# Altium PCB Player.PcbDoc
Units mm, origin at the board's own origin, x right, y up, seen from the top; angles counter-clockwise.
Board outline 30 x 70 mm, 2 copper layers (Top Layer, Bottom Layer); 116 components, 240 nets, 954 pads, 32 vias.
Unrouted connection lines stored in the file: 497.
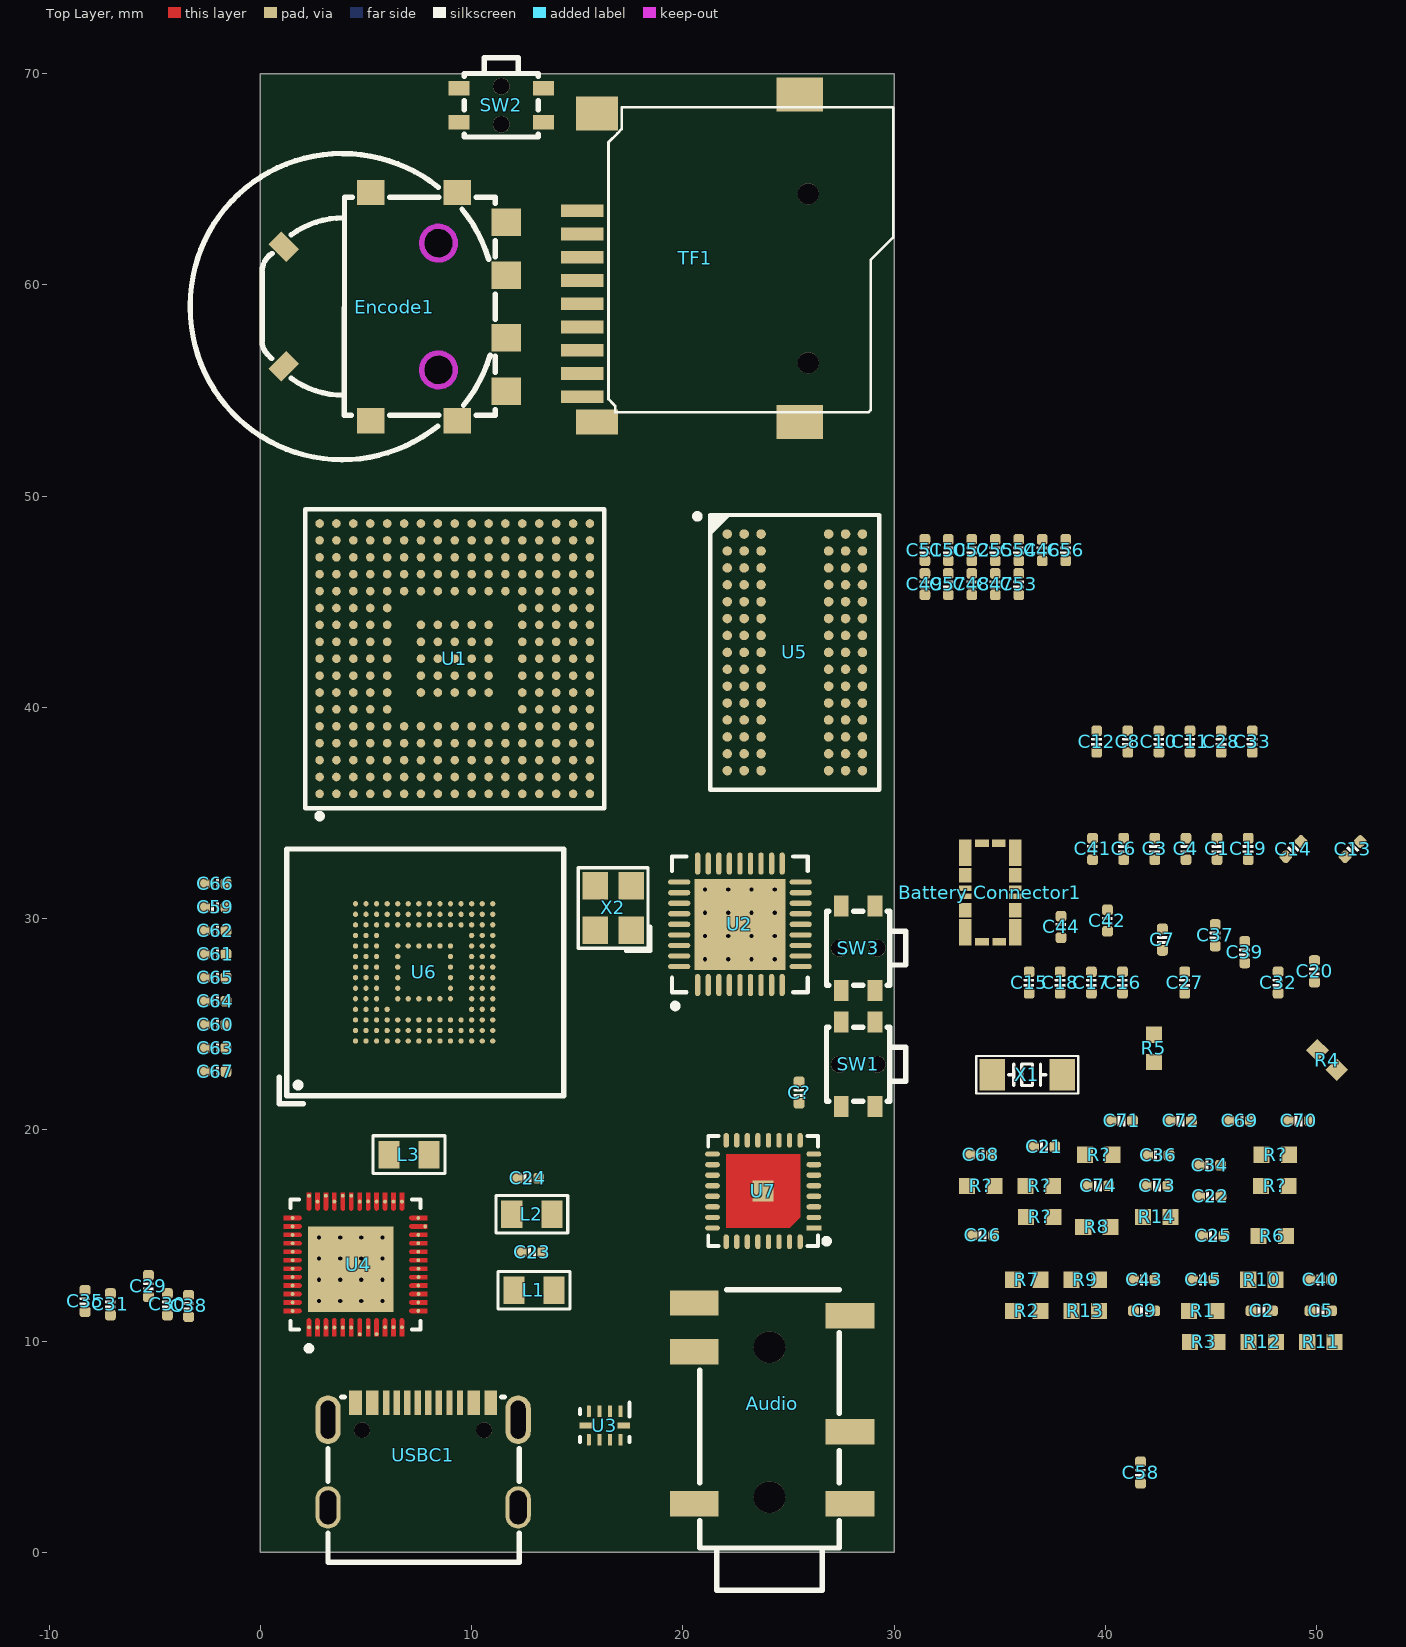
[diagram p0: Top Layer view]
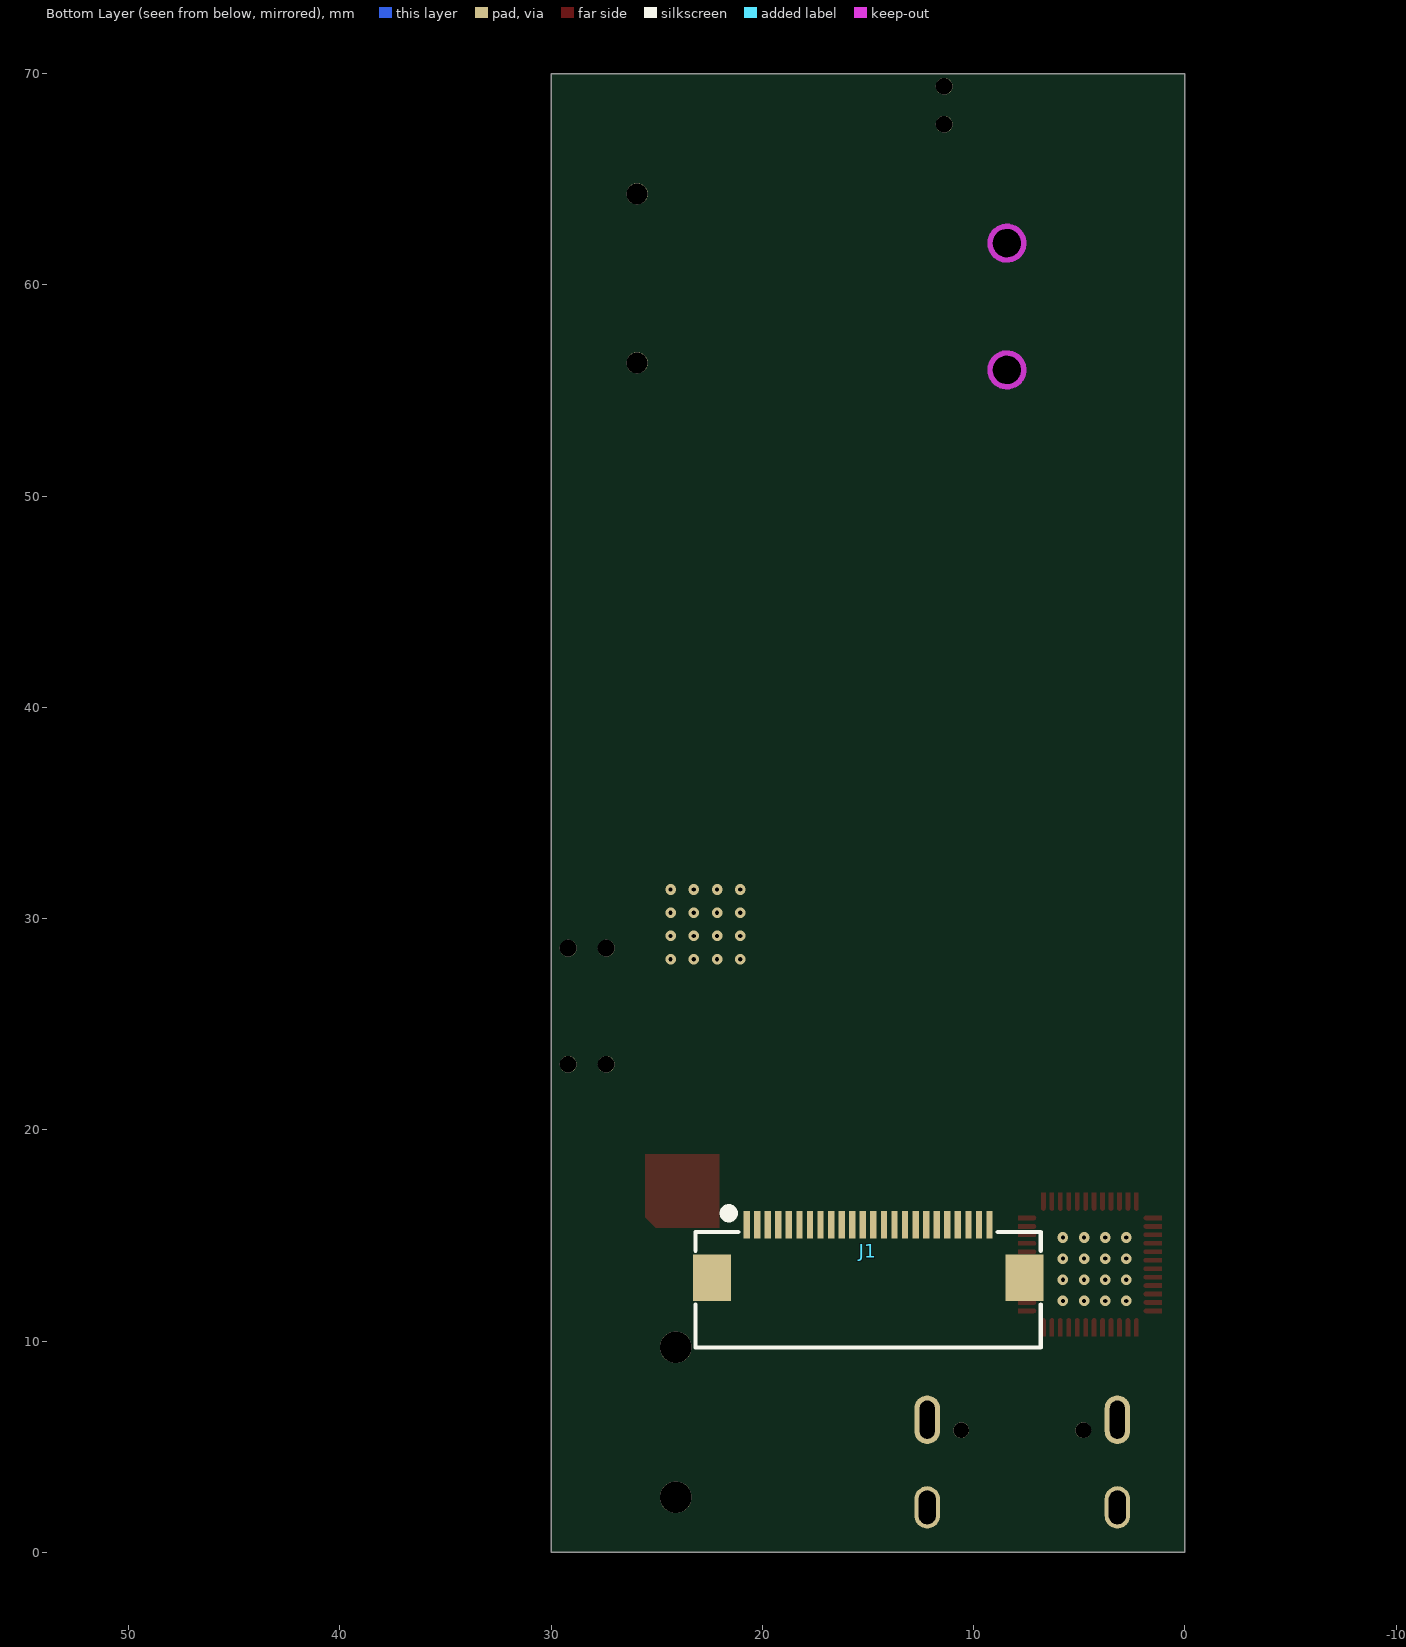
[diagram p1: Bottom Layer view, seen from below]

## Layer stack, top to bottom
Top Solder: solder mask 0.0102, Solder Resist, Dk 3.5
Top Layer: signal copper 0.0356
Dielectric 1: dielectric 0.32, FR-4, Dk 4.8
Bottom Layer: signal copper 0.0356
Bottom Solder: solder mask 0.0102, Solder Resist, Dk 3.5

## Board outline
0,0 0,70 30,70 30,0

## Design rules (kind name [scope] priority, off if disabled: settings)
Clearance [All] p1: gap=0.254 ignorepadtopadclearanceinfootprint=FALSE
DiffPairsRouting "Schematic Differential Pairs Routing_1" [InNetClass('MIPI')] p1: maxlimit=0.254 minlimit=0.102 mostfreqgap=0.152 toplayer_minwidth=0.102 toplayer_maxwidth=0.381 toplayer_prefwidth=0.152 bottomlayer_minwidth=0.102 bottomlayer_maxwidth=0.381 bottomlayer_prefwidth=0.152 maxuncoupledlength=2.54
DiffPairsRouting "Schematic Differential Pairs Routing" [InDifferentialPairClass('USB')] p2: maxlimit=0.254 minlimit=0.102 mostfreqgap=0.152 toplayer_minwidth=0.102 toplayer_maxwidth=0.381 toplayer_prefwidth=0.152 bottomlayer_minwidth=0.102 bottomlayer_maxwidth=0.381 bottomlayer_prefwidth=0.152 maxuncoupledlength=2.54
DiffPairsRouting [All] p3: maxlimit=0.254 minlimit=0.254 mostfreqgap=0.254 toplayer_minwidth=0.381 toplayer_maxwidth=0.381 toplayer_prefwidth=0.381 bottomlayer_minwidth=0.381 bottomlayer_maxwidth=0.381 bottomlayer_prefwidth=0.381 maxuncoupledlength=12.7
MatchedLengths "Schematic Matched Net Lengths" [InNetClass('MIPI')] p1: tolerance=1.27 checknetsindiffpair=FALSE checkdiffpairvsdiffpair=TRUE checkxsignals=TRUE checkothers=TRUE
PolygonConnect [All] p1: connectstyle=Relief reliefconductorwidth=0.254 reliefentries=4 polygonreliefangle="90 Angle" airgapwidth=0.254
RoutingVias [All] p1: holewidth=0.711 width=1.27 viastyle="Through Hole" minholewidth=0.711 minwidth=1.27 maxholewidth=0.711 maxwidth=1.27
SolderMaskExpansion [All] p1: expansion=0.102 istentingtop=FALSE
SupplyNets "Schematic Supply Nets_19" [InNet('VFBSMPS')] p1: voltage=0.000
SupplyNets "Schematic Supply Nets_18" [InNet('VDDCAPDSI')] p2: voltage=0.000
SupplyNets "Schematic Supply Nets_16" [InNet('VSYS')] p3: voltage=0.000
SupplyNets "Schematic Supply Nets_15" [InNet('VCC')] p4: voltage=0.000
SupplyNets "Schematic Supply Nets_14" [InNet('VLDO2_3.3V')] p5: voltage=0.000
SupplyNets "Schematic Supply Nets_12" [InNet('VLDO3_1.8V')] p6: voltage=0.000
SupplyNets "Schematic Supply Nets_11" [InNet('VBUS')] p7: voltage=0.000
SupplyNets "Schematic Supply Nets_10" [InNet('VBATT')] p8: voltage=0.000
SupplyNets "Schematic Supply Nets_9" [InNet('VDCDC2')] p9: voltage=0.000
SupplyNets "Schematic Supply Nets_8" [InNet('VLDO1_1.8V')] p10: voltage=0.000
SupplyNets "Schematic Supply Nets_5" [InNet('VDCDC1')] p11: voltage=0.000
SupplyNets "Schematic Supply Nets_4" [InNet('VLDO4_3.3V')] p12: voltage=0.000
SupplyNets "Schematic Supply Nets_1" [InNet('VDCDC3')] p13: voltage=0.000
Width [All] p1: maxlimit=0.254 minlimit=0.254 preferedwidth=0.254
29 further rules are at their usual default settings.

## Classes and differential pairs
differential pair class USB: DBG_USB MCU_USB USB
differential pair class MIPI: DSI_CK DSI_D0 DSI_D1
net class MIPI: DSI_CK_N DSI_CK_P DSI_D0_N DSI_D0_P DSI_D1_N DSI_D1_P
differential pair USB: +USB_P -USB_N
differential pair MCU_USB: +MCU_USB_P -MCU_USB_N
differential pair DSI_D1: +DSI_D1_P -DSI_D1_N
differential pair DSI_D0: +DSI_D0_P -DSI_D0_N
differential pair DSI_CK: +DSI_CK_P -DSI_CK_N
differential pair DBG_USB: +DBG_USB_P -DBG_USB_N

## Components (designator, comment, footprint, x,y, rotation, side; value= is the part's Value field where it differs from the comment)
Audio "PJ342" PJ342A 24.1,-1.8 r180 top
"Battery Connector1" "BM25-4S" BM25-4S/2-V-51 34.549,31.228 r90 top
C1 "10p" 0402-C 45.287,33.293 r270 top value=0.1u
C2 "10p" 0402-C 47.401,11.427 r0 top value=0.1u
C3 "0.1uF" 0402-C 42.341,33.293 r270 top value=0.1u
C4 "0.1uF" 0402-C 43.814,33.293 r90 top value=0.1u
C5 "0.1uF" 0402-C 50.195,11.427 r0 top value=0.1u
C6 "0.1uF" 0402-C 40.867,33.293 r270 top value=0.1u
C7 "0.1uF" 0402-C 42.7,29 r90 top value=0.1u
C8 "0.1uF" 0402-C 41.062,38.376 r270 top value=0.1u
C9 "0.1uF" 0402-C 41.834,11.427 r0 top value=0.1u
C10 "0.1uF" 0402-C 42.536,38.376 r90 top value=0.1u
C11 "0.1uF" 0402-C 44.009,38.376 r270 top value=0.1u
C12 "0.1uF" 0402-C 39.589,38.376 r270 top value=0.1u
C13 "0.1uF" 0402-C 51.707,33.287 r45 top value=0.1u
C14 "0.1uF" 0402-C 48.9,33.287 r45 top value=0.1u
C15 "0.1uF" 0402-C 36.391,26.97 r90 top value=0.1u
C16 "0.1uF" 0402-C 40.811,26.97 r90 top value=0.1u
C17 "0.1uF" 0402-C 39.338,26.97 r90 top value=0.1u
C18 "0.1uF" 0402-C 37.864,26.97 r90 top value=0.1u
C19 "0.1uF" 0402-C 46.76,33.293 r270 top value=0.1u
C20 "10uF" 0402-C 49.9,27.5 r270 top value=0.1u
C21 "0.1uF" 0402-C 37.1,19.2 r0 top value=0.1u
C22 "10uF" 0402-C 44.96,16.846 r0 top value=0.1u
C23 "10uF" 0402-C 12.862,14.2 r180 top value=0.1u
C24 "10uF" 0402-C 12.662,17.7 r180 top value=0.1u
C25 "10uF" 0402-C 45.108,14.973 r0 top value=0.1u
C26 "0.1uF" 0402-C 34.2,15 r0 top value=0.1u
C27 "3.9p" 0402-C 43.757,26.97 r90 top value=0.1u
C28 "3.9p" 0402-C 45.482,38.376 r90 top value=0.1u
C29 "10uF" 0402-C -5.3,12.6 r90 top value=0.1u
C30 "10uF" 0402-C -4.4,11.738 r270 top value=0.1u
C31 "10uF" 0402-C -7.1,11.738 r270 top value=0.1u
C32 "10uF" 0402-C 48.177,26.97 r270 top value=0.1u
C33 "10uF" 0402-C 46.955,38.376 r270 top value=0.1u
C34 "10uF" 0402-C 44.94,18.32 r0 top value=0.1u
C35 "10uF" 0402-C -8.3,11.892 r270 top value=0.1u
C36 "10uF" 0402-C 42.5,18.8 r0 top value=0.1u
C37 "0.1uF" 0402-C 45.2,29.208 r90 top value=0.1u
C38 "10uF" 0402-C -3.4,11.662 r90 top value=0.1u
C39 "10uF" 0402-C 46.6,28.408 r90 top value=0.1u
C40 "10uF" 0402-C 50.195,12.9 r0 top value=0.1u
C41 "10uF" 0402-C 39.394,33.293 r270 top value=0.1u
C42 "10uF" 0402-C 40.1,29.9 r270 top value=0.1u
C43 "0.1uF" 0402-C 41.834,12.9 r0 top value=0.1u
C44 "0.1uF" 0402-C 37.9,29.6 r270 top value=0.1u
C45 "0.1uF" 0402-C 44.628,12.9 r0 top value=0.1u
C46 "100nF" 0402-C 37.012,47.44 r270 top value=0.1u
C47 "100nF" 0402-C 34.789,45.829 r270 top value=0.1u
C48 "100nF" 0402-C 33.678,45.829 r270 top value=0.1u
C49 "100nF" 0402-C 31.456,45.829 r90 top value=0.1u
C50 "100nF" 0402-C 32.567,47.44 r90 top value=0.1u
C51 "100nF" 0402-C 31.456,47.44 r90 top value=0.1u
C52 "100nF" 0402-C 33.678,47.44 r90 top value=0.1u
C53 "100nF" 0402-C 35.9,45.829 r270 top value=0.1u
C54 "100nF" 0402-C 35.9,47.44 r270 top value=0.1u
C55 "100nF" 0402-C 34.789,47.44 r270 top value=0.1u
C56 "100nF" 0402-C 38.123,47.44 r90 top value=0.1u
C57 "100nF" 0402-C 32.567,45.829 r90 top value=0.1u
C58 "1uF" 0402-C 41.665,3.773 r90 top value=0.1u
C59 "100nF" 0402-C -2.14,30.534 r180 top value=0.1u
C60 "100nF" 0402-C -2.14,24.978 r180 top value=0.1u
C61 "100nF" 0402-C -2.14,28.312 r180 top value=0.1u
C62 "100nF" 0402-C -2.14,29.423 r180 top value=0.1u
C63 "100nF" 0402-C -2.14,23.867 r180 top value=0.1u
C64 "100nF" 0402-C -2.14,26.089 r180 top value=0.1u
C65 "100nF" 0402-C -2.14,27.2 r180 top value=0.1u
C66 "100nF" 0402-C -2.14,31.645 r180 top value=0.1u
C67 "100nF" 0402-C -2.14,22.756 r180 top value=0.1u
C68 "1uF" 0402-C 34.105,18.82 r0 top value=0.1u
C69 "1uF" 0402-C 46.36,20.431 r0 top value=0.1u
C70 "1uF" 0402-C 49.154,20.431 r0 top value=0.1u
C71 "1uF" 0402-C 40.772,20.431 r0 top value=0.1u
C72 "1uF" 0402-C 43.566,20.431 r0 top value=0.1u
C73 "1uF" 0402-C 42.446,17.346 r0 top value=0.1u
C74 "1uF" 0402-C 39.652,17.346 r0 top value=0.1u
C? "1uF" 0402-C 25.5,21.762 r90 top value=0.1u
Encode1 "SIQ-02FVS3" SW-SMD_SIQ-02FVS3_1 6.364,58.972 r90 top
J1 "YDP290H001-V3" FPC0.5-WT-24P 15,13 r180 bottom locked
L1 "2.2uH" L0805 12.95,12.4 r0 top
L2 "2.2uH" L0805 12.85,16 r180 top
L3 "2.2uH" L0805 7.032,18.825 r0 top
R1 "5.1k" 0603-R 44.617,11.427 r180 top
R2 "5.1k" 0603-R 36.277,11.427 r180 top
R3 "10k" 0603-R 44.659,9.954 r0 top
R4 "10k" 0603-R 50.5,23.3 r135 top
R5 "10K" 0603-R 42.3,23.85 r270 top
R6 "10K" 0603-R 47.892,14.973 r180 top
R7 "100" 0603-R 36.277,12.9 r0 top
R8 "10K" 0603-R 39.6,15.4 r180 top
R9 "10K" 0603-R 39.05,12.9 r180 top
R10 "10K" 0603-R 47.411,12.9 r0 top
R11 "10K" 0603-R 50.205,9.954 r0 top
R12 "10K" 0603-R 47.432,9.954 r180 top
R13 "56K" 0603-R 39.05,11.427 r180 top
R14 "56K" 0603-R 42.435,15.873 r0 top
R? "10K" 0603-R 48.044,18.82 r0 top
R? "10K" 0603-R 34.095,17.346 r0 top
R? "10K" 0603-R 36.868,17.346 r0 top
R? "10K" 0603-R 39.683,18.82 r0 top
R? "10K" 0603-R 48.023,17.346 r0 top
R? "10K" 0603-R 36.889,15.873 r0 top
SW1 "TD-1187SA-250" SW-SMD-3.5*3.0_4P 28.3,23.1 r270 top
SW2 "TD-1187SA-250" SW-SMD-3.5*3.0_4P 11.4,68.5 r0 top
SW3 "TD-1187SA-250" SW-SMD-3.5*3.0_4P 28.3,28.6 r270 top
TF1 "TF CARD" TF卡座 22.6,61 r0 top
U1 "STM32H747XIH6" FP-TFBGA240+25-A07U-MFG 9.2,42.3 r90 top
U2 "STM32F103TBU6" VFQFPN36_N 22.7,29.725 r90 top
U3 "TS3USB221ARSER" RSE0010A_V 16.3,6 r270 top
U4 "TPS65217DRSLR" FP-RSL0048A-MFG 4.5,13.625 r90 top
U5 "IS42S32800G-6BLI" BGA-90_L13.0-W8.0-R6-C15-P0.80-TL 25.3,42.6 r0 top
U6 "KLM8G1GETF-B041006" FBGA-153_L13.0-W11.5-P0.50_KLMAG1JETD-B041 7.75,27.45 r90 top
U7 "ES9039Q2M" "QFN32 5x5_L" 23.8,17.1 r90 top
USBC1 "USB Type C -16P" USB-C-SMD_16P 7.7,4.6 r180 top
X1 "8M" XTAL-3215-2P 36.3,22.6 r0 top
X2 "25M" XTAL-3225-4P 16.7,30.5 r90 top

## Footprints (in the part's own frame and the unit in brackets; to place one, negate y for a bottom-side part, rotate by r counter-clockwise, add the part's x,y. Pads: shape width x height; smd on the part's side, far side on the other; paste and mask are expansions set on the pad)
0402-C [mil]
  rrect50% 20x20 smd: 1(-20,0) 2(20,0)
  silkscreen extent -7,-9 7,9, body extent -20,-10 20,10, height 20
0603-R [mil] "1/10W贴片电阻"
  rect 30x30 smd: 1(-25.59,0) 2(25.59,0)
  body extent -31,-16 31,16, height 16
BGA-90_L13.0-W8.0-R6-C15-P0.80-TL [mm]
  round 0.45 smd: A1(-3.2,5.6) A2(-2.4,5.6) A3(-1.6,5.6) A7(1.6,5.6) A8(2.4,5.6) A9(3.2,5.6) B1(-3.2,4.8) B2(-2.4,4.8) B3(-1.6,4.8) B7(1.6,4.8) B8(2.4,4.8) B9(3.2,4.8) C1(-3.2,4) C2(-2.4,4) C3(-1.6,4) C7(1.6,4) C8(2.4,4) C9(3.2,4) D1(-3.2,3.2) D2(-2.4,3.2) D3(-1.6,3.2) D7(1.6,3.2) D8(2.4,3.2) D9(3.2,3.2) E1(-3.2,2.4) E2(-2.4,2.4) E3(-1.6,2.4) E7(1.6,2.4) E8(2.4,2.4) E9(3.2,2.4) F1(-3.2,1.6) F2(-2.4,1.6) F3(-1.6,1.6) F7(1.6,1.6) F8(2.4,1.6) F9(3.2,1.6) G1(-3.2,0.8) G2(-2.4,0.8) G3(-1.6,0.8) G7(1.6,0.8) G8(2.4,0.8) G9(3.2,0.8) H1(-3.2,0) H2(-2.4,0) H3(-1.6,0) H7(1.6,0) H8(2.4,0) H9(3.2,0) J1(-3.2,-0.8) J2(-2.4,-0.8) J3(-1.6,-0.8) J7(1.6,-0.8) J8(2.4,-0.8) J9(3.2,-0.8) K1(-3.2,-1.6) K2(-2.4,-1.6) K3(-1.6,-1.6) K7(1.6,-1.6) K8(2.4,-1.6) K9(3.2,-1.6) L1(-3.2,-2.4) L2(-2.4,-2.4) L3(-1.6,-2.4) L7(1.6,-2.4) L8(2.4,-2.4) L9(3.2,-2.4) M1(-3.2,-3.2) M2(-2.4,-3.2) M3(-1.6,-3.2) M7(1.6,-3.2) M8(2.4,-3.2) M9(3.2,-3.2) N1(-3.2,-4) N2(-2.4,-4) N3(-1.6,-4) N7(1.6,-4) N8(2.4,-4) N9(3.2,-4) P1(-3.2,-4.8) P2(-2.4,-4.8) P3(-1.6,-4.8) P7(1.6,-4.8) P8(2.4,-4.8) P9(3.2,-4.8) R1(-3.2,-5.6) R2(-2.4,-5.6) R3(-1.6,-5.6) R7(1.6,-5.6) R8(2.4,-5.6) R9(3.2,-5.6)
  silkscreen extent -4.74,-6.5 4,6.56, body extent -4,-6.5 4,6.5, height 0.9
BM25-4S/2-V-51 [mm] "Battery Connector"
  rect 0.7x0.6 smd: 1(-0.833,-1.185) 2(-0.833,1.185) 7(0.818,-1.185) 8(0.818,1.185)
  rect 0.25x0.6 smd: 3(-0.175,-1.185) 4(-0.175,1.185) 5(0.206,-1.185) 6(0.206,1.185)
  rect 1.25x0.6 smd: 9(-1.881,-1.185) 10(-1.881,1.185) 11(1.881,-1.185) 12(1.881,1.185)
  rect 0.35x0.65 smd: 13(-2.331,-0.423) 14(-2.331,0.395) 15(2.331,-0.399) 16(2.331,0.395)
  body extent -2.5,-1.3 2.5,1.3, height 0.7
FBGA-153_L13.0-W11.5-P0.50_KLMAG1JETD-B041 [mm]
  round 0.25 smd paste-100 mask+0.05: A1(-3.25,3.25) A2(-2.75,3.25) A3(-2.25,3.25) A4(-1.75,3.25) A5(-1.25,3.25) A6(-0.75,3.25) A7(-0.25,3.25) A8(0.25,3.25) A9(0.75,3.25) A10(1.25,3.25) A11(1.75,3.25) A12(2.25,3.25) A13(2.75,3.25) A14(3.25,3.25) B1(-3.25,2.75) B2(-2.75,2.75) B3(-2.25,2.75) B4(-1.75,2.75) B5(-1.25,2.75) B6(-0.75,2.75) B7(-0.25,2.75) B8(0.25,2.75) B9(0.75,2.75) B10(1.25,2.75) B11(1.75,2.75) B12(2.25,2.75) B13(2.75,2.75) B14(3.25,2.75) C1(-3.25,2.25) C2(-2.75,2.25) C3(-2.25,2.25) C4(-1.75,2.25) C5(-1.25,2.25) C6(-0.75,2.25) C7(-0.25,2.25) C8(0.25,2.25) C9(0.75,2.25) C10(1.25,2.25) C11(1.75,2.25) C12(2.25,2.25) C13(2.75,2.25) C14(3.25,2.25) D1(-3.25,1.75) D2(-2.75,1.75) D3(-2.25,1.75) D4(-1.75,1.75) D12(2.25,1.75) D13(2.75,1.75) D14(3.25,1.75) E1(-3.25,1.25) E2(-2.75,1.25) E3(-2.25,1.25) E5(-1.25,1.25) E6(-0.75,1.25) E7(-0.25,1.25) E8(0.25,1.25) E9(0.75,1.25) E10(1.25,1.25) E12(2.25,1.25) E13(2.75,1.25) E14(3.25,1.25) F1(-3.25,0.75) F2(-2.75,0.75) F3(-2.25,0.75) F5(-1.25,0.75) F10(1.25,0.75) F12(2.25,0.75) F13(2.75,0.75) F14(3.25,0.75) G1(-3.25,0.25) G2(-2.75,0.25) G3(-2.25,0.25) G5(-1.25,0.25) G10(1.25,0.25) G12(2.25,0.25) G13(2.75,0.25) G14(3.25,0.25) H1(-3.25,-0.25) H2(-2.75,-0.25) H3(-2.25,-0.25) H5(-1.25,-0.25) H10(1.25,-0.25) H12(2.25,-0.25) H13(2.75,-0.25) H14(3.25,-0.25) J1(-3.25,-0.75) J2(-2.75,-0.75) J3(-2.25,-0.75) J5(-1.25,-0.75) J10(1.25,-0.75) J12(2.25,-0.75) J13(2.75,-0.75) J14(3.25,-0.75) K1(-3.25,-1.25) K2(-2.75,-1.25) K3(-2.25,-1.25) K5(-1.25,-1.25) K6(-0.75,-1.25) K7(-0.25,-1.25) K8(0.25,-1.25) K9(0.75,-1.25) K10(1.25,-1.25) K12(2.25,-1.25) K13(2.75,-1.25) K14(3.25,-1.25) L1(-3.25,-1.75) L2(-2.75,-1.75) L3(-2.25,-1.75) L12(2.25,-1.75) L13(2.75,-1.75) L14(3.25,-1.75) M1(-3.25,-2.25) M2(-2.75,-2.25) M3(-2.25,-2.25) M4(-1.75,-2.25) M5(-1.25,-2.25) M6(-0.75,-2.25) M7(-0.25,-2.25) M8(0.25,-2.25) M9(0.75,-2.25) M10(1.25,-2.25) M11(1.75,-2.25) M12(2.25,-2.25) M13(2.75,-2.25) M14(3.25,-2.25) N1(-3.25,-2.75) N2(-2.75,-2.75) N3(-2.25,-2.75) N4(-1.75,-2.75) N5(-1.25,-2.75) N6(-0.75,-2.75) N7(-0.25,-2.75) N8(0.25,-2.75) N9(0.75,-2.75) N10(1.25,-2.75) N11(1.75,-2.75) N12(2.25,-2.75) N13(2.75,-2.75) N14(3.25,-2.75) P1(-3.25,-3.25) P2(-2.75,-3.25) P3(-2.25,-3.25) P4(-1.75,-3.25) P5(-1.25,-3.25) P6(-0.75,-3.25) P7(-0.25,-3.25) P8(0.25,-3.25) P9(0.75,-3.25) P10(1.25,-3.25) P11(1.75,-3.25) P12(2.25,-3.25) P13(2.75,-3.25) P14(3.25,-3.25)
  silkscreen extent -6.22,-6.61 5.84,6.86, body extent -5.75,-6.5 5.75,6.5, height 0.89
FP-RSL0048A-MFG [mm] "QFN, 16-Leads, Body 3x3mm, Pitch 0.5mm, Thermal Pad 1.3x1.3mm, IPC Low Density"
  round 0.18 smd paste+0 mask+0: 1(-2.975,2.2) 2(-2.985,1.8) 3(-2.985,1.4) 4(-2.985,1) 5(-2.985,0.6) 6(-2.985,0.2) 7(-3.3,-0.2) 8(-2.975,-0.6) 9(-3.3,-1) 10(-2.975,-1.4) 11(-2.975,-1.8) 12(-2.975,-2.2) 13(-2.2,-2.975) 14(-1.8,-2.975) 15(-1.4,-2.985) 16(-1,-2.975) 17(-0.6,-2.985) 18(-0.2,-2.985) 19(0.2,-2.975) 20(0.6,-2.975) 21(1,-2.975) 22(1.4,-2.975) 23(1.8,-3.3) 24(2.2,-2.975) 25(2.975,-2.2) 26(2.975,-1.8) 27(2.975,-1.4) 28(2.975,-1) 29(2.985,-0.6) 30(2.975,-0.2) 31(3.25,0.2) 32(3.25,0.6) 33(2.975,1) 34(3.25,1.4) 35(2.975,1.8) 36(3.25,2.2) 37(2.2,2.975) 38(1.8,2.975) 39(1.4,2.975) 40(1,2.975) 41(0.6,2.975) 42(0.2,2.975) 43(-0.2,2.975) 44(-0.6,2.975) 45(-1,2.975) 46(-1.4,2.975) 47(-1.8,2.975) 48(-2.2,2.975)
  rect 4.05x4.05 smd paste-1000 mask+0: 49(-0.225,0.225)
  Top Layer region: -2.1,3.4 -2.1,2.65 -2.113,2.6 -2.15,2.563 -2.2,2.55 -2.2,2.55 -2.238,2.558 -2.271,2.579 -2.292,2.612 -2.3,2.65 -2.3,2.65 -2.3,3.4
  Top Layer region: -1.7,3.4 -1.7,2.65 -1.708,2.612 -1.729,2.579 -1.762,2.558 -1.8,2.55 -1.8,2.55 -1.838,2.558 -1.871,2.579 -1.892,2.612 -1.9,2.65 -1.9,2.65 -1.9,3.4
  Top Layer region: -1.3,3.4 -1.3,2.65 -1.313,2.6 -1.35,2.563 -1.4,2.55 -1.4,2.55 -1.438,2.558 -1.471,2.579 -1.492,2.612 -1.5,2.65 -1.5,2.65 -1.5,3.4
  Top Layer region: -0.9,3.4 -0.9,2.65 -0.908,2.612 -0.929,2.579 -0.962,2.558 -1,2.55 -1,2.55 -1.038,2.558 -1.071,2.579 -1.092,2.612 -1.1,2.65 -1.1,2.65 -1.1,3.4
  Top Layer region: -0.5,3.4 -0.5,2.65 -0.508,2.612 -0.529,2.579 -0.562,2.558 -0.6,2.55 -0.6,2.55 -0.638,2.558 -0.671,2.579 -0.692,2.612 -0.7,2.65 -0.7,2.65 -0.7,3.4
  Top Layer region: -0.1,3.4 -0.1,2.65 -0.113,2.6 -0.15,2.563 -0.2,2.55 -0.2,2.55 -0.238,2.558 -0.271,2.579 -0.292,2.612 -0.3,2.65 -0.3,2.65 -0.3,3.4
  Top Layer region: 0.3,3.4 0.3,2.65 0.292,2.612 0.271,2.579 0.238,2.558 0.2,2.55 0.2,2.55 0.162,2.558 0.129,2.579 0.108,2.612 0.1,2.65 0.1,2.65 0.1,3.4
  Top Layer region: 0.7,3.4 0.7,2.65 0.692,2.612 0.671,2.579 0.638,2.558 0.6,2.55 0.6,2.55 0.562,2.558 0.529,2.579 0.508,2.612 0.5,2.65 0.5,2.65 0.5,3.4
  Top Layer region: 1.1,3.4 1.1,2.65 1.092,2.612 1.071,2.579 1.038,2.558 1,2.55 1,2.55 0.962,2.558 0.929,2.579 0.908,2.612 0.9,2.65 0.9,2.65 0.9,3.4
  Top Layer region: 1.5,3.4 1.5,2.65 1.492,2.612 1.471,2.579 1.438,2.558 1.4,2.55 1.4,2.55 1.362,2.558 1.329,2.579 1.308,2.612 1.3,2.65 1.3,2.65 1.3,3.4
  Top Layer region: 1.9,3.4 1.9,2.65 1.892,2.612 1.871,2.579 1.838,2.558 1.8,2.55 1.8,2.55 1.762,2.558 1.729,2.579 1.708,2.612 1.7,2.65 1.7,2.65 1.7,3.4
  Top Layer region: 2.3,3.4 2.3,2.65 2.287,2.6 2.25,2.563 2.2,2.55 2.2,2.55 2.162,2.558 2.129,2.579 2.108,2.612 2.1,2.65 2.1,2.65 2.1,3.4
  Top Layer region: 3.4,2.1 2.65,2.1 2.612,2.108 2.579,2.129 2.558,2.162 2.55,2.2 2.55,2.2 2.558,2.238 2.579,2.271 2.612,2.292 2.65,2.3 2.65,2.3 3.4,2.3
  Top Layer region: 3.4,1.7 2.65,1.7 2.612,1.708 2.579,1.729 2.558,1.762 2.55,1.8 2.55,1.8 2.558,1.838 2.579,1.871 2.612,1.892 2.65,1.9 2.65,1.9 3.4,1.9
  Top Layer region: 3.4,1.3 2.65,1.3 2.612,1.308 2.579,1.329 2.558,1.362 2.55,1.4 2.55,1.4 2.558,1.438 2.579,1.471 2.612,1.492 2.65,1.5 2.65,1.5 3.4,1.5
  Top Layer region: 3.4,0.9 2.65,0.9 2.612,0.908 2.579,0.929 2.558,0.962 2.55,1 2.55,1 2.558,1.038 2.579,1.071 2.612,1.092 2.65,1.1 2.65,1.1 3.4,1.1
  Top Layer region: 3.4,0.5 2.65,0.5 2.612,0.508 2.579,0.529 2.558,0.562 2.55,0.6 2.55,0.6 2.558,0.638 2.579,0.671 2.612,0.692 2.65,0.7 2.65,0.7 3.4,0.7
  Top Layer region: 3.4,0.1 2.65,0.1 2.612,0.108 2.579,0.129 2.558,0.162 2.55,0.2 2.55,0.2 2.558,0.238 2.579,0.271 2.612,0.292 2.65,0.3 2.65,0.3 3.4,0.3
  Top Layer region: 3.4,-0.3 2.65,-0.3 2.612,-0.292 2.579,-0.271 2.558,-0.238 2.55,-0.2 2.55,-0.2 2.558,-0.162 2.579,-0.129 2.612,-0.108 2.65,-0.1 2.65,-0.1 3.4,-0.1
  Top Layer region: 3.4,-0.7 2.65,-0.7 2.612,-0.692 2.579,-0.671 2.558,-0.638 2.55,-0.6 2.55,-0.6 2.558,-0.562 2.579,-0.529 2.612,-0.508 2.65,-0.5 2.65,-0.5 3.4,-0.5
  Top Layer region: 3.4,-1.1 2.65,-1.1 2.612,-1.092 2.579,-1.071 2.558,-1.038 2.55,-1 2.55,-1 2.558,-0.962 2.579,-0.929 2.612,-0.908 2.65,-0.9 2.65,-0.9 3.4,-0.9
  Top Layer region: 3.4,-1.5 2.65,-1.5 2.612,-1.492 2.579,-1.471 2.558,-1.438 2.55,-1.4 2.55,-1.4 2.558,-1.362 2.579,-1.329 2.612,-1.308 2.65,-1.3 2.65,-1.3 3.4,-1.3
  Top Layer region: 3.4,-1.9 2.65,-1.9 2.612,-1.892 2.579,-1.871 2.558,-1.838 2.55,-1.8 2.55,-1.8 2.558,-1.762 2.579,-1.729 2.612,-1.708 2.65,-1.7 2.65,-1.7 3.4,-1.7
  Top Layer region: 3.4,-2.3 2.65,-2.3 2.612,-2.292 2.579,-2.271 2.558,-2.238 2.55,-2.2 2.55,-2.2 2.558,-2.162 2.579,-2.129 2.612,-2.108 2.65,-2.1 2.65,-2.1 3.4,-2.1
  Top Layer region: 2.1,-3.4 2.1,-2.65 2.108,-2.612 2.129,-2.579 2.162,-2.558 2.2,-2.55 2.2,-2.55 2.238,-2.558 2.271,-2.579 2.292,-2.612 2.3,-2.65 2.3,-2.65 2.3,-3.4
  Top Layer region: 1.7,-3.4 1.7,-2.65 1.708,-2.612 1.729,-2.579 1.762,-2.558 1.8,-2.55 1.8,-2.55 1.838,-2.558 1.871,-2.579 1.892,-2.612 1.9,-2.65 1.9,-2.65 1.9,-3.4
  Top Layer region: 1.3,-3.4 1.3,-2.65 1.308,-2.612 1.329,-2.579 1.362,-2.558 1.4,-2.55 1.4,-2.55 1.438,-2.558 1.471,-2.579 1.492,-2.612 1.5,-2.65 1.5,-2.65 1.5,-3.4
  Top Layer region: 0.9,-3.4 0.9,-2.65 0.908,-2.612 0.929,-2.579 0.962,-2.558 1,-2.55 1,-2.55 1.038,-2.558 1.071,-2.579 1.092,-2.612 1.1,-2.65 1.1,-2.65 1.1,-3.4
  Top Layer region: 0.5,-3.4 0.5,-2.65 0.508,-2.612 0.529,-2.579 0.562,-2.558 0.6,-2.55 0.6,-2.55 0.638,-2.558 0.671,-2.579 0.692,-2.612 0.7,-2.65 0.7,-2.65 0.7,-3.4
  Top Layer region: 0.1,-3.4 0.1,-2.65 0.108,-2.612 0.129,-2.579 0.162,-2.558 0.2,-2.55 0.2,-2.55 0.238,-2.558 0.271,-2.579 0.292,-2.612 0.3,-2.65 0.3,-2.65 0.3,-3.4
  Top Layer region: -0.3,-3.4 -0.3,-2.65 -0.292,-2.612 -0.271,-2.579 -0.238,-2.558 -0.2,-2.55 -0.2,-2.55 -0.162,-2.558 -0.129,-2.579 -0.108,-2.612 -0.1,-2.65 -0.1,-2.65 -0.1,-3.4
  Top Layer region: -0.7,-3.4 -0.7,-2.65 -0.692,-2.612 -0.671,-2.579 -0.638,-2.558 -0.6,-2.55 -0.6,-2.55 -0.562,-2.558 -0.529,-2.579 -0.508,-2.612 -0.5,-2.65 -0.5,-2.65 -0.5,-3.4
  Top Layer region: -1.1,-3.4 -1.1,-2.65 -1.092,-2.612 -1.071,-2.579 -1.038,-2.558 -1,-2.55 -1,-2.55 -0.962,-2.558 -0.929,-2.579 -0.908,-2.612 -0.9,-2.65 -0.9,-2.65 -0.9,-3.4
  Top Layer region: -1.5,-3.4 -1.5,-2.65 -1.492,-2.612 -1.471,-2.579 -1.438,-2.558 -1.4,-2.55 -1.4,-2.55 -1.362,-2.558 -1.329,-2.579 -1.308,-2.612 -1.3,-2.65 -1.3,-2.65 -1.3,-3.4
  Top Layer region: -1.9,-3.4 -1.9,-2.65 -1.892,-2.612 -1.871,-2.579 -1.838,-2.558 -1.8,-2.55 -1.8,-2.55 -1.762,-2.558 -1.729,-2.579 -1.708,-2.612 -1.7,-2.65 -1.7,-2.65 -1.7,-3.4
  Top Layer region: -2.3,-3.4 -2.3,-2.65 -2.292,-2.612 -2.271,-2.579 -2.238,-2.558 -2.2,-2.55 -2.2,-2.55 -2.162,-2.558 -2.129,-2.579 -2.108,-2.612 -2.1,-2.65 -2.1,-2.65 -2.1,-3.4
  Top Layer region: -3.4,-2.1 -2.65,-2.1 -2.612,-2.108 -2.579,-2.129 -2.558,-2.162 -2.55,-2.2 -2.55,-2.2 -2.563,-2.25 -2.6,-2.287 -2.65,-2.3 -2.65,-2.3 -3.4,-2.3
  Top Layer region: -3.4,-1.7 -2.65,-1.7 -2.612,-1.708 -2.579,-1.729 -2.558,-1.762 -2.55,-1.8 -2.55,-1.8 -2.563,-1.85 -2.6,-1.887 -2.65,-1.9 -2.65,-1.9 -3.4,-1.9
  Top Layer region: -3.4,-1.3 -2.65,-1.3 -2.612,-1.308 -2.579,-1.329 -2.558,-1.362 -2.55,-1.4 -2.55,-1.4 -2.563,-1.45 -2.6,-1.487 -2.65,-1.5 -2.65,-1.5 -3.4,-1.5
  Top Layer region: -3.4,-0.9 -2.65,-0.9 -2.612,-0.908 -2.579,-0.929 -2.558,-0.962 -2.55,-1 -2.55,-1 -2.558,-1.038 -2.579,-1.071 -2.612,-1.092 -2.65,-1.1 -2.65,-1.1 -3.4,-1.1
  Top Layer region: -3.4,-0.5 -2.65,-0.5 -2.612,-0.508 -2.579,-0.529 -2.558,-0.562 -2.55,-0.6 -2.55,-0.6 -2.558,-0.638 -2.579,-0.671 -2.612,-0.692 -2.65,-0.7 -2.65,-0.7 -3.4,-0.7
  Top Layer region: -3.4,-0.1 -2.65,-0.1 -2.612,-0.108 -2.579,-0.129 -2.558,-0.162 -2.55,-0.2 -2.55,-0.2 -2.558,-0.238 -2.579,-0.271 -2.612,-0.292 -2.65,-0.3 -2.65,-0.3 -3.4,-0.3
  Top Layer region: -3.4,0.3 -2.65,0.3 -2.612,0.292 -2.579,0.271 -2.558,0.238 -2.55,0.2 -2.55,0.2 -2.558,0.162 -2.579,0.129 -2.612,0.108 -2.65,0.1 -2.65,0.1 -3.4,0.1
  Top Layer region: -3.4,0.7 -2.65,0.7 -2.612,0.692 -2.579,0.671 -2.558,0.638 -2.55,0.6 -2.55,0.6 -2.558,0.562 -2.579,0.529 -2.612,0.508 -2.65,0.5 -2.65,0.5 -3.4,0.5
  Top Layer region: -3.4,1.1 -2.65,1.1 -2.612,1.092 -2.579,1.071 -2.558,1.038 -2.55,1 -2.55,1 -2.558,0.962 -2.579,0.929 -2.612,0.908 -2.65,0.9 -2.65,0.9 -3.4,0.9
  Top Layer region: -3.4,1.5 -2.65,1.5 -2.612,1.492 -2.579,1.471 -2.558,1.438 -2.55,1.4 -2.55,1.4 -2.558,1.362 -2.579,1.329 -2.612,1.308 -2.65,1.3 -2.65,1.3 -3.4,1.3
  Top Layer region: -3.4,1.9 -2.65,1.9 -2.612,1.892 -2.579,1.871 -2.558,1.838 -2.55,1.8 -2.55,1.8 -2.563,1.75 -2.6,1.713 -2.65,1.7 -2.65,1.7 -3.4,1.7
  Top Layer region: -3.4,2.3 -2.65,2.3 -2.612,2.292 -2.579,2.271 -2.558,2.238 -2.55,2.2 -2.55,2.2 -2.563,2.15 -2.6,2.113 -2.65,2.1 -2.65,2.1 -3.4,2.1
  silkscreen extent -4.1,-3.08 3.08,3.08, body extent -3.5,-3.5 3.5,3.5, height 0.25
FP-TFBGA240+25-A07U-MFG [mil]
  round 16 smd: A1(-251.97,251.97) A2(-220.47,251.97) A3(-188.98,251.97) A4(-157.48,251.97) A5(-125.98,251.97) A6(-94.49,251.97) A7(-62.99,251.97) A8(-31.5,251.97) A9(0,251.97) A10(31.5,251.97) A11(62.99,251.97) A12(94.49,251.97) A13(125.98,251.97) A14(157.48,251.97) A15(188.98,251.97) A16(220.47,251.97) A17(251.97,251.97) B1(-251.97,220.47) B2(-220.47,220.47) B3(-188.98,220.47) B4(-157.48,220.47) B5(-125.98,220.47) B6(-94.49,220.47) B7(-62.99,220.47) B8(-31.5,220.47) B9(0,220.47) B10(31.5,220.47) B11(62.99,220.47) B12(94.49,220.47) B13(125.98,220.47) B14(157.48,220.47) B15(188.98,220.47) B16(220.47,220.47) B17(251.97,220.47) C1(-251.97,188.98) C2(-220.47,188.98) C3(-188.98,188.98) C4(-157.48,188.98) C5(-125.98,188.98) C6(-94.49,188.98) C7(-62.99,188.98) C8(-31.5,188.98) C9(0,188.98) C10(31.5,188.98) C11(62.99,188.98) C12(94.49,188.98) C13(125.98,188.98) C14(157.48,188.98) C15(188.98,188.98) C16(220.47,188.98) C17(251.97,188.98) D1(-251.97,157.48) D2(-220.47,157.48) D3(-188.98,157.48) D4(-157.48,157.48) D5(-125.98,157.48) D6(-94.49,157.48) D7(-62.99,157.48) D8(-31.5,157.48) D9(0,157.48) D10(31.5,157.48) D11(62.99,157.48) D12(94.49,157.48) D13(125.98,157.48) D14(157.48,157.48) D15(188.98,157.48) D16(220.47,157.48) D17(251.97,157.48) E1(-251.97,125.98) E2(-220.47,125.98) E3(-188.98,125.98) E4(-157.48,125.98) E5(-125.98,125.98) E6(-94.49,125.98) E7(-62.99,125.98) E8(-31.5,125.98) E9(0,125.98) E10(31.5,125.98) E11(62.99,125.98) E12(94.49,125.98) E13(125.98,125.98) E14(157.48,125.98) E15(188.98,125.98) E16(220.47,125.98) E17(251.97,125.98) F1(-251.97,94.49) F2(-220.47,94.49) F3(-188.98,94.49) F4(-157.48,94.49) F5(-125.98,94.49) F13(125.98,94.49) F14(157.48,94.49) F15(188.98,94.49) F16(220.47,94.49) F17(251.97,94.49) G1(-251.97,62.99) G2(-220.47,62.99) G3(-188.98,62.99) G4(-157.48,62.99) G5(-125.98,62.99) G7(-62.99,62.99) G8(-31.5,62.99) G9(0,62.99) G10(31.5,62.99) G11(62.99,62.99) G13(125.98,62.99) G14(157.48,62.99) G15(188.98,62.99) G16(220.47,62.99) G17(251.97,62.99) H1(-251.97,31.5) H2(-220.47,31.5) H3(-188.98,31.5) H4(-157.48,31.5) H5(-125.98,31.5) H7(-62.99,31.5) H8(-31.5,31.5) H9(0,31.5) H10(31.5,31.5) H11(62.99,31.5) H13(125.98,31.5) H14(157.48,31.5) H15(188.98,31.5) H16(220.47,31.5) H17(251.97,31.5) J1(-251.97,0) J2(-220.47,0) J3(-188.98,0) J4(-157.48,0) J5(-125.98,0) J7(-62.99,0) J8(-31.5,0) J9(0,0) J10(31.5,0) J11(62.99,0) J13(125.98,0) J14(157.48,0) J15(188.98,0) J16(220.47,0) J17(251.97,0) K1(-251.97,-31.5) K2(-220.47,-31.5) K3(-188.98,-31.5) K4(-157.48,-31.5) K5(-125.98,-31.5) K7(-62.99,-31.5) K8(-31.5,-31.5) K9(0,-31.5) K10(31.5,-31.5) K11(62.99,-31.5) K13(125.98,-31.5) K14(157.48,-31.5) K15(188.98,-31.5) K16(220.47,-31.5) K17(251.97,-31.5) L1(-251.97,-62.99) L2(-220.47,-62.99) L3(-188.98,-62.99) L4(-157.48,-62.99) L5(-125.98,-62.99) L7(-62.99,-62.99) L8(-31.5,-62.99) L9(0,-62.99) L10(31.5,-62.99) L11(62.99,-62.99) L13(125.98,-62.99) L14(157.48,-62.99) L15(188.98,-62.99) L16(220.47,-62.99) L17(251.97,-62.99) M1(-251.97,-94.49) M2(-220.47,-94.49) M3(-188.98,-94.49) M4(-157.48,-94.49) M5(-125.98,-94.49) M13(125.98,-94.49) M14(157.48,-94.49) M15(188.98,-94.49) M16(220.47,-94.49) M17(251.97,-94.49) N1(-251.97,-125.98) N2(-220.47,-125.98) N3(-188.98,-125.98) N4(-157.48,-125.98) N5(-125.98,-125.98) N6(-94.49,-125.98) N7(-62.99,-125.98) N8(-31.5,-125.98) N9(0,-125.98) N10(31.5,-125.98) N11(62.99,-125.98) N12(94.49,-125.98) N13(125.98,-125.98) N14(157.48,-125.98) N15(188.98,-125.98) N16(220.47,-125.98) N17(251.97,-125.98) P1(-251.97,-157.48) P2(-220.47,-157.48) P3(-188.98,-157.48) P4(-157.48,-157.48) P5(-125.98,-157.48) P6(-94.49,-157.48) P7(-62.99,-157.48) P8(-31.5,-157.48) P9(0,-157.48) P10(31.5,-157.48) P11(62.99,-157.48) P12(94.49,-157.48) P13(125.98,-157.48) P14(157.48,-157.48) P15(188.98,-157.48) P16(220.47,-157.48) P17(251.97,-157.48) R1(-251.97,-188.98) R2(-220.47,-188.98) R3(-188.98,-188.98) R4(-157.48,-188.98) R5(-125.98,-188.98) R6(-94.49,-188.98) R7(-62.99,-188.98) R8(-31.5,-188.98) R9(0,-188.98) R10(31.5,-188.98) R11(62.99,-188.98) R12(94.49,-188.98) R13(125.98,-188.98) R14(157.48,-188.98) R15(188.98,-188.98) R16(220.47,-188.98) R17(251.97,-188.98) T1(-251.97,-220.47) T2(-220.47,-220.47) T3(-188.98,-220.47) T4(-157.48,-220.47) T5(-125.98,-220.47) T6(-94.49,-220.47) T7(-62.99,-220.47) T8(-31.5,-220.47) T9(0,-220.47) T10(31.5,-220.47) T11(62.99,-220.47) T12(94.49,-220.47) T13(125.98,-220.47) T14(157.48,-220.47) T15(188.98,-220.47) T16(220.47,-220.47) T17(251.97,-220.47) U1(-251.97,-251.97) U2(-220.47,-251.97) U3(-188.98,-251.97) U4(-157.48,-251.97) U5(-125.98,-251.97) U6(-94.49,-251.97) U7(-62.99,-251.97) U8(-31.5,-251.97) U9(0,-251.97) U10(31.5,-251.97) U11(62.99,-251.97) U12(94.49,-251.97) U13(125.98,-251.97) U14(157.48,-251.97) U15(188.98,-251.97) U16(220.47,-251.97) U17(251.97,-251.97)
  silkscreen extent -298,-279 279,279, body extent -298,-298 298,298, height 10
FPC0.5-WT-24P [mm] "长：16.2mm，宽：5.2mm，高：2mm 淘宝ID:黄晶宝石   店铺网址:https://shop463601444.taobao.com"
  rect 1.8x2.2 smd: 0(-7.4,0) 0(7.4,0)
  rect 0.3x1.3 smd: 1(-5.75,2.497) 2(-5.25,2.497) 3(-4.75,2.497) 4(-4.25,2.497) 5(-3.75,2.497) 6(-3.25,2.497) 7(-2.75,2.497) 8(-2.25,2.497) 9(-1.75,2.497) 10(-1.25,2.497) 11(-0.75,2.497) 12(-0.25,2.497) 13(0.25,2.497) 14(0.75,2.497) 15(1.25,2.497) 16(1.75,2.497) 17(2.25,2.497) 18(2.75,2.497) 19(3.25,2.497) 20(3.75,2.497) 21(4.25,2.497) 22(4.75,2.497) 23(5.25,2.497) 24(5.75,2.497)
  silkscreen extent -8.18,-3.3 8.18,3.23, body extent -8.1,-3.15 8.1,2.85, height 2
L0805 [mm] "0805贴片叠层电感"
  rect 1x1.3 smd: 1(-0.95,0) 2(0.95,0)
  silkscreen extent -1.7,-0.89 1.7,0.89, body extent -1,-0.65 1,0.65, height 1.3
PJ342A [mm] "沉板式，有头"
  round 1.5 hole 1.5: 0(0,-4.4) 0(0,-11.5)
  rect 2.3x1.2 smd: 1(-3.81,-4.1) 2(3.556,-4.1) 3(-3.81,-7.5) 4(3.556,-11.3) 5(-3.81,-13) 6(3.556,-13.6)
  silkscreen extent -3.3,-14.22 3.3,0, body extent -4.2,-14.15 4.1,-0.05, height 4.75
"QFN32 5x5_L" [mm] "32脚，长x宽x高：5x5x0.95mm，脚距：0.5mm"
  rect 0.25x0.7 smd: 1(-1.751,-2.4)
  oval 0.25x0.7 smd: 2(-1.25,-2.4) 3(-0.75,-2.4) 4(-0.25,-2.4) 5(0.25,-2.4) 6(0.75,-2.4) 7(1.25,-2.4) 8(1.75,-2.4) 17(1.75,2.4) 18(1.25,2.4) 19(0.75,2.4) 20(0.25,2.4) 21(-0.25,2.4) 22(-0.75,2.4) 23(-1.25,2.4) 24(-1.75,2.4)
  oval 0.7x0.25 smd: 9(2.4,-1.75) 10(2.4,-1.25) 11(2.4,-0.75) 12(2.4,-0.25) 13(2.4,0.25) 14(2.4,0.75) 15(2.4,1.25) 16(2.4,1.75) 25(-2.4,1.75) 26(-2.4,1.25) 27(-2.4,0.75) 28(-2.4,0.25) 29(-2.4,-0.25) 30(-2.4,-0.75) 31(-2.4,-1.25) 32(-2.4,-1.75)
  rect 1x1 smd: 33(0,0)
  Top Layer region: -1.75,1.75 1.75,1.75 1.75,-1.75 -1.25,-1.75 -1.75,-1.25
  silkscreen extent -2.6,-3.13 2.6,2.6, body extent -2.5,-2.5 2.5,2.5, height 1.01
RSE0010A_V [mm] "QFN, 10-Leads, Body 1.5x2mm, Pitch 0.5mm, TI Recommended"
  rrect50% 0.55x0.2 smd: 1(-0.675,0.75) 2(-0.675,0.25) 3(-0.675,-0.25) 4(-0.675,-0.75) 6(0.675,-0.75) 7(0.675,-0.25) 8(0.675,0.25) 9(0.675,0.75)
  rrect33% 0.3x0.6 smd: 5(0,-0.9) 10(0,0.9)
  silkscreen extent -1.07,-1.17 0.77,1.18, body extent -0.77,-1.02 0.78,1.03, height 0.61
SW-SMD-3.5*3.0_4P [mm]
  round 0.8 hole 0.8 unplated mask+0: 0(0,0.9) 0(0,-0.9)
  rect 1x0.7 smd mask+0.051: 1(-2,0.8) 2(-2,-0.8) 3(2,-0.8) 4(2,0.8)
  silkscreen extent -1.75,-1.5 1.75,2.25, body extent -2.3,-1.51 2.3,2.24, height 1.33
SW-SMD_SIQ-02FVS3_1 [mm]
  rect 1.2x1.3 smd paste+0 mask+0.05: 1(5.4,-2.964) 2(5.4,1.136) 5(-5.4,1.136) 6(-5.4,-2.964)
  rect 0.85x1.2 smd rot 135 paste+0 mask+0.05: 3(2.828,5.264)
  rect 0.85x1.2 smd rot 45 paste+0 mask+0.05: 4(-2.828,5.264)
  rect 1.3x1.4 smd paste+0 mask+0.05: A(-4,-5.264) B(4,-5.264) C(1.475,-5.264) S(-1.475,-5.264)
  Keep-Out Layer board cut-out: -2.2,-2.064 -2.2,-1.959 -2.255,-1.755 -2.36,-1.573 -2.509,-1.424 -2.691,-1.319 -2.895,-1.264 -3.105,-1.264 -3.309,-1.319 -3.491,-1.424 -3.64,-1.573 -3.746,-1.755 -3.8,-1.959 -3.8,-2.064 -3.8,-2.17 -3.746,-2.373 -3.64,-2.555 -3.491,-2.704 -3.309,-2.81 -3.105,-2.864 -2.895,-2.864 -2.691,-2.81 -2.509,-2.704 -2.36,-2.555 -2.255,-2.373 -2.2,-2.17 -2.2,-2.064 -2.2,-2.064
  Keep-Out Layer board cut-out: 3.8,-2.064 3.8,-1.959 3.745,-1.755 3.64,-1.573 3.491,-1.424 3.309,-1.319 3.105,-1.264 2.895,-1.264 2.691,-1.319 2.509,-1.424 2.36,-1.573 2.254,-1.755 2.2,-1.959 2.2,-2.064 2.2,-2.17 2.254,-2.373 2.36,-2.555 2.509,-2.704 2.691,-2.81 2.895,-2.864 3.105,-2.864 3.309,-2.81 3.491,-2.704 3.64,-2.555 3.745,-2.373 3.8,-2.17 3.8,-2.064 3.8,-2.064
  Keep-Out Layer circle w0.254: c-3,-2.064 r0.8
  Keep-Out Layer circle w0.025: c-3,-2.064 r0.8
  Keep-Out Layer circle w0.254: c3,-2.064 r0.8
  Keep-Out Layer circle w0.025: c3,-2.064 r0.8
  silkscreen extent -7.25,-4.76 7.25,9.69, body extent -7.18,-5.15 7.21,9.64, height 4
TF卡座 [mm]
  round 1 hole 1 unplated: 0(3.334,-4.696) 0(3.334,3.305)
  rect 2x0.6 smd: 1(-7.366,2.505) 2(-7.366,1.405) 3(-7.366,0.305) 4(-7.366,-0.795) 5(-7.366,-1.895) 6(-7.366,-2.995) 7(-7.366,-4.095) 8(-7.366,-5.195) 9(-7.366,-6.295)
  rect 2x1.2 smd: 10(-6.666,-7.495)
  rect 2.2x1.6 smd: 11(2.934,-7.495) 12(2.934,8.005)
  rect 2x1.6 smd: 13(-6.666,7.105)
  silkscreen extent -6.12,-7.04 7.35,7.4, body extent -7.82,-7.8 9.38,8.3, height 3.2
USB-C-SMD_16P [mm] "封装库来自淘宝ID:黄晶宝石"
  oval 1.2x2.3 hole 0.7 slot 1.8 at 90 deg: 0(-4.5,-1.675) 0(4.5,-1.675)
  oval 1.2x2 hole 0.8 slot 1.6 at 90 deg: 0(-4.5,2.475) 0(4.5,2.475)
  rect 0.3x1.15 smd: A1(3.35,-2.473) A4(2.55,-2.471) A5(1.25,-2.475) A6(0.25,-2.475) A7(-0.25,-2.473) A9(-2.55,-2.475) A12(-3.35,-2.475) B1(-3.05,-2.475) B4(-2.25,-2.475) B5(-1.75,-2.475) B6(-0.75,-2.475) B7(0.75,-2.473) B9(2.25,-2.471) B12(3.05,-2.473)
  rect 0.3x1.148 smd: A8(1.75,-2.475) B8(-1.25,-2.475)
  round 0.75 hole 0.75 unplated: ""(-2.89,-1.175) ""(2.89,-1.175)
  silkscreen extent -4.56,-2.75 4.5,5.08, body extent -4.45,-2.87 4.49,5.03, height 3.25
VFQFPN36_N [mm] "QFN, 36-Leads, Body 6x6mm, Pitch 0.5mm, Thermal Pad 4.3x4.3mm, IPC Medium Density最新版本联系淘宝卖家 ID：黄晶宝石"
  oval 1.05x0.25 smd: 1(-2.875,2) 2(-2.875,1.5) 3(-2.875,1) 4(-2.875,0.5) 5(-2.875,0) 6(-2.875,-0.5) 7(-2.875,-1) 8(-2.875,-1.5) 9(-2.875,-2) 19(2.875,-2) 20(2.875,-1.5) 21(2.875,-1) 22(2.875,-0.5) 23(2.875,0) 24(2.875,0.5) 25(2.875,1) 26(2.875,1.5) 27(2.875,2)
  oval 0.25x1.05 smd: 10(-2,-2.875) 11(-1.5,-2.875) 12(-1,-2.875) 13(-0.5,-2.875) 14(0,-2.875) 15(0.5,-2.875) 16(1,-2.875) 17(1.5,-2.875) 18(2,-2.875) 28(2,2.875) 29(1.5,2.875) 30(1,2.875) 31(0.5,2.875) 32(0,2.875) 33(-0.5,2.875) 34(-1,2.875) 35(-1.5,2.875) 36(-2,2.875)
  rect 4.3x4.3 smd: 37(0,0)
  silkscreen extent -3.99,-3.21 3.21,3.21, body extent -3.05,-3.07 3.07,3.05, height 0.8
XTAL-3215-2P [mm] "3.2*1.5*0.6mm(长宽高)"
  rect 1.2x1.5 smd: 1(-1.65,0) 2(1.65,0)
  silkscreen extent -2.41,-0.89 2.41,0.89, body extent -1.6,-0.75 1.6,0.75, height 0.61
XTAL-3225-4P [mm] "3.2*2.5*0.7mm(长宽高)                             淘宝ID:黄晶宝石"
  rect 1.3x1.2 smd: 1(-1.05,-0.85) 2(1.05,-0.85) 3(1.05,0.85) 4(-1.05,0.85)
  silkscreen extent -2.03,-1.75 1.91,1.65, body extent -1.6,-1.25 1.6,1.25, height 0.7

## Part data
Audio: "3.5耳机插座,4Pin", BOM名称=耳机插座, 当前库版本V2023.8.14 @淘宝卖家:黄晶宝石=最新版本发布https://item.taobao.com/item.htm?id=566775463719
"Battery Connector1": library part BM25-4S/2-V-51, "Battery"
C1 C2 C3 C4 C5 C6 C7 C8 C9 C10 C11 C12 C13 C14 C15 C16 C17 C18 C19 C20 C21 C22 C23 C24 C25 C26 C27 C28 C29 C30 C31 C32 C33 C34 C35 C36 C37 C38 C39 C40 C41 C42 C43 C44 C45 C46 C47 C48 C49 C50 C51 C52 C53 C54 C55 C56 C57 C58 C59 C60 C61 C62 C63 C64 C65 C66 C67 C68 C69 C70 C71 C72 C73 C74 C?: library part 电容-0402, "Capacitor"
Encode1: JLCPCB Part Class="Extended Part", LCSC Part Name=拨轮滚轮旋转编码器开关, Manufacturer=MITSUMI(美上美), Add into BOM=yes, Convert to PCB=yes, Datasheet=https://atta.szlcsc.com/upload/public/pdf/source/20220728/2FBC1A98A06DC86460FC69DAE20456FC.pdf, DEVICE=SIQ-02FVS3, Manufacturer Part=SIQ-02FVS3, Supplier=LCSC, Supplier Footprint=SMD, Supplier Part=C2925423, Symbol=SIQ-02FVS3
J1: "鱼鹰光电"
L1 L2 L3: library part L, "贴片小功率电感", BOM名称=小功率贴片电感, 联系下单店铺卖家 免费帮你查找封装="联系下单店铺卖家 免费技术支持"
R1 R2 R3 R4 R5 R6 R7 R8 R9 R10 R11 R12 R13 R14 R? R? R? R? R? R?: library part R, "贴片电阻", BOM名称=贴片电阻, 联系卖家，免费查找封装=唯一出售店铺网址https://shop463601444.taobao.com
SW1 SW2 SW3: "小乌龟-侧按4脚开关 带定位柱", 联系下单店铺卖家 免费技术支持="联系下单店铺卖家 免费帮你查找封装"
TF1: library part SD_Card_flip
U1: library part CMP-12105-000055-1, "HIGH-PERFORMANCE AND DSP WITH DP", Ambient Temperature Range High=+85°C, Ambient Temperature Range Low=-40°C, Frequency=480MHz, Manufacturer=STMicroelectronics, Max Junction Temp=+125°C, Max Supply Voltage=3.6V, Min Supply Voltage=1.2V, Package=TFBGA240+25-A07U, Temperature="-40°C to +125°C", Automotive=No, Category=IC, ComponentLink2Description=Datasheet, ComponentLink2URL=https://www.st.com/resource/en/datasheet/stm32h747xi.pdf, Core Architecture="ARM Cortex-M4, ARM Cortex-M7", Data Bus Width=32bits, Device Class L1="Integrated Circuits (ICs)", Device Class L2="Embedded Processors and Controllers", Device Class L3=Microcontrollers, Digikey Description="HIGH-PERFORMANCE AND DSP WITH DP", Height=1.1mm, Interface=I2C,SPI,UART,USART,CAN,USB,LIN,IrDA,Ethernet,I2S,SMBus,Other, Ipc Land Pattern Name=BGA289N80P17X17_1400X1400X110, Lead Free=Yes, Manufacturer Part Number=STM32H747XIH6, Memory Size=2MBytes, Memory Type=FLASH, Mouser Description="STM32 Series 2 MB Flash 1 MB RAM 480 MHz 32-Bit Microcontroller - TFBGA-265", Number Of A/D Converters=3, Number Of Adc Channels=36, Number Of Cores=2, Number Of Ethernet Channels=1, Number Of I2C Channels=4, Number Of I/Os=168, Number Of Pwm Channels=2, Number Of Spi Channels=6, Number Of Timers/Counters=22, Number Of Uart Channels=9, Number Of Usb Channels=2, Octopart=https://octopart.com/stm32h747xih6-stmicroelectronics-100293943, Ram Size=1MBytes, RoHS=TRUE, Standoff Height=0.15mm, Temperature Range High=+125°C, Temperature Range Low=-40°C
U2: "STM32 ARM-based 32-bit MCU Performance Line with 128 kB Flash, 20 kB Internal RAM, -40 to +85癈 Temperature, 36-Pin VFQFPN, Tray", ComponentLink1Description="Manufacturer URL", ComponentLink1URL=http://www.st.com/, ComponentLink2Description="STM32F103 Datasheet", ComponentLink2URL=http://www.st.com/internet/com/TECHNICAL_RESOURCES/TECHNICAL_LITERATURE/DATASHEET/CD00161566.pdf, ComponentLink3Description="STM32 Family Web Page", ComponentLink3URL=www.st.com/stm32, DatasheetVersion="rev13.0, Apr-2011", PackageDescription="36-Pin Quad Flat No-Lead, 6 x 6 X 1.0 mm Body, 0.5 mm Pitch, Exposed Pad", PackageReference=VFQFPN36, PackageVersion=2011, 封装库来自淘宝卖家：黄晶宝石=最新版本发布https://shop463601444.taobao.com
U3: library part CMP-0309-00017-2, "ESD Protected,High-Speed USB 2.0 (480-Mbps) 1:2 Multiplexer / Demultiplexer Switch, 1:2 Mux / Demux, 6 ohm RON, 2.5 to 3.3V, -40 to 85 degC, 10-Pin UQFN (RSE), Green (RoHS & no Sb/Br)", Manufacturer="Texas Instruments", Architecture="\"1\",\"2 mux/demux\"", Bandwidth(MHz)=900, Code_JEDEC=MO-288-UEFD, ComponentLink1Description=Datasheet, ComponentLink1URL=http://www.ti.com/general/docs/lit/getliterature.tsp?genericPartNumber=TS3USB221A&fileType=pdf, ComponentLink2Description="Package Specification", ComponentLink2URL=http://www.ti.com/lit/ml/mpqf186c/mpqf186c.pdf, DatasheetVersion=SCDS277, Eco-Plan="Green (RoHS & no Sb/Br)", ESD HBM(kV)=+/-7, ICC(uA)=30, IL OFF(Max)(nA)=2, Mounting Technology="Surface Mount", Number of Channels=2, OFF Time(Max)(ns)=12, ON Time(Max)(ns)=30, PackageDescription="10-Leads Plastic Quad Flatpack No-Lead, 2 x 1.5 x 0.55 mm Body, 0.5 mm Pitch", PackageReference=RSE0010A, PackageVersion="revD, Jan-2011", PartNumber=TS3USB221ARSER, RON Flatness(Max)(Ohms)=1, RON Mis-match(Max)(Ohms)=0.2, ron(max)(ohms)=6, SubFamily="USB Switch", tpd max(ns)=0.25, Vcc range(V)="2.3 to 3.6"
U4: library part CMP-1518-00018-3, "IC PMIC BATT PWR SYST 48VQFN", Case/Package=VQFN, Max Operating Temperature=105°C, Min Operating Temperature=-40°C, Nominal Supply Current=2.5A, Operating Supply Voltage=5.8V, Output Current=1.2A, Output Voltage=3.3V, Package Quantity=2500, Lead Free="Lead Free", Max Duty Cycle=100%, Mount="Surface Mount", Number of Outputs=7, Number of Pins=48, Packaging="Tape and Reel", Radiation Hardening=No, RoHS Compliant=Yes
U5: JLCPCB Part Class="Extended Part", Manufacturer=ISSI(美国芯成), Add into BOM=yes, Convert to PCB=yes, Datasheet=https://atta.szlcsc.com/upload/public/pdf/source/20220614/2E4F120B9DE0CAEE6B87FE9099754B7F.pdf, DEVICE=IS42S32800G-6BLI, LCSC Part Name=IS42S32800G-6BLI, Manufacturer Part=IS42S32800G-6BLI, Name=IS42S32800G-6BLI, Supplier=LCSC, Supplier Footprint=TFBGA-90(8x13), Supplier Part=C2920767, Symbol=IS42S32800G-6BLI
U6: Manufacturer=SAMSUNG(三星半导体), Add into BOM=yes, Convert to PCB=yes, Datasheet=https://atta.szlcsc.com/upload/public/pdf/source/20240221/0DCF3FBB535A67C02EC39E54F7AEA7E4.pdf, DEVICE=KLM8G1GETF-B041006_1, LCSC Part Name=KLM8G1GETF-B041006, Manufacturer Part=KLM8G1GETF-B041006, Supplier=LCSC, Supplier Footprint=FBGA-153(11.5x13), Supplier Part=C20622996, Symbol=KLM8G1GETF-B041006_C20622996
USBC1: library part "USB-Tyoe-C 16P-2.0", "type-C-16pin"
X1: library part XTAL-2P, "2脚无源晶振(谐振器）", BOM名称=2脚无源晶振(谐振器）, 联系下单店铺卖家 免费帮你查找封装="联系下单店铺卖家 免费技术支持"
X2: library part XTAL-4P, "4脚无源晶振(谐振器）", BOM名称=4脚无源晶振(谐振器）, 联系下单店铺卖家 免费帮你查找封装="联系下单店铺卖家 免费技术支持"

## Via types
v1: diameter 0.5, hole 0.2, Top Layer to Bottom Layer, 32 vias

## Nets (pads, with @x,y where several pads share a name; then routed paths per layer and width w, separated by ;. In a path a pad name is that pad's centre, name@x,y a point inside that pad or via, vN(x,y) a via of type N, cw(c..) or ccw(c..) an arc to the next point about the centre after c; other vN are vias at no path point)
Audio_GPIO1: U7.28
Audio_GPIO2: U7.27
Audio_GPIO3: U1.H17 U7.26
Audio_GPIO4: U1.C8 U7.25
Audio_GPIO5: U1.B8 U7.24
Audio_GPIO6: U1.A8 U7.23
Audio_GPIO7: U1.C7 U7.22
Audio_GPIO8: U1.D7 U7.21
BATT_ID: "Battery Connector1.4"
BATT_TS: "Battery Connector1.3" R11.1 U4.11
BOOT0: R10.2 SW3.1 U1.E8
Connected_LED: U2.33
DBG_CLK: U2.28
DBG_DIO: U2.25
DBG_RX: U1.D15 U2.10
DBG_TX: U1.D14 U2.9
DBG_USB_N: U2.23 U3.4
DBG_USB_P: U2.24 U3.3
Debuger_LED: U2.21
DSI_CK_N: U1.L17
DSI_CK_P: U1.L16
DSI_D0_N: U1.M17
DSI_D0_P: U1.M16
DSI_D1_N: U1.K17
DSI_D1_P: U1.K16
ENC_A: C43.1 Encode1.A
ENC_B: C45.1 Encode1.B
ENC_S: C44.1 Encode1.S R6.1 U1.E4 U3.9
FMC_A0: U1.G4 U5.G8
FMC_A1: U1.G3 U5.G9
FMC_A2: U1.G1 U5.F7
FMC_A3: U1.H4 U5.F3
FMC_A4: U1.J5 U5.G1
FMC_A5: U1.J4 U5.G2
FMC_A6: U1.R7 U5.G3
FMC_A7: U1.P7 U5.H1
FMC_A8: U1.P8 U5.H2
FMC_A9: U1.R9 U5.J3
FMC_A10: U1.T8 U5.G7
FMC_A11: U1.U8 U5.H9
FMC_A12: U5.H3
FMC_A14: U1.H14 U5.J7
FMC_A15: U1.G14 U5.H8
FMC_D0: U1.P16 U5.R8
FMC_D1: U1.P15 U5.N7
FMC_D2: U1.D13 U5.R9
FMC_D3: U1.E12 U5.N8
FMC_D4: U1.U9 U5.P9
FMC_D5: U1.T9 U5.M8
FMC_D6: U1.P9 U5.M7
FMC_D7: U1.N9 U5.L8
FMC_D8: U1.P10 U5.L2
FMC_D9: U1.R10 U5.M3
FMC_D10: U1.T10 U5.M2
FMC_D11: U1.U10 U5.P1
FMC_D12: U1.R11 U5.N2
FMC_D13: U1.U16 U5.R1
FMC_D14: U1.T17 U5.N3
FMC_D15: U1.T16 U5.R2
FMC_D16: U1.T13 U5.E8
FMC_D17: U1.R13 U5.D7
FMC_D18: U1.P13 U5.D8
FMC_D19: U1.P14 U5.B9
FMC_D20: U1.R14 U5.C8
FMC_D21: U1.D16 U5.A9
FMC_D22: U1.B17 U5.C7
FMC_D23: U1.B16 U5.A8
FMC_D24: U1.A16 U5.A2
FMC_D25: U1.A15 U5.C3
FMC_D26: U1.B15 U5.A1
FMC_D27: U1.C14 U5.C2
FMC_D28: U1.A2 U5.B1
FMC_D29: U1.B3 U5.D2
FMC_D30: U1.E2 U5.D3
FMC_D31: U1.F3 U5.E2
FMC_NBL0: U1.C4 U5.K9
FMC_NBL1: U1.B4 U5.K1
FMC_NBL2: U1.A4 U5.F8
FMC_NBL3: U1.A3 U5.F2
FMC_SDC\A\S\: U1.D6 U5.K7
FMC_SDC\S\1: U1.T11 U5.J8
FMC_SDCKE1: U1.U13 U5.J2
FMC_SDCLK: U1.F15 U5.J1
FMC_SDR\A\S\: U1.T7 U5.J9
FMC_SDW\E\: U1.L2 U5.K8
I2S1_CK: U1.T3 U7.12
I2S1_MCK: U1.T4 U7.32
I2S1_SDO: U1.R5 U7.14
I2S1_WS: U1.U3 U7.13
LCD_CS: J1.12 U1.J15
LCD_DC: J1.11 U1.N15
LCD_MOSI: J1.14 U1.L14
LCD_RST: J1.10 U1.R12
LCD_SCK: J1.13 U1.J14
LCD_TE: J1.9
MCU_USB_N: U1.E17 U3.2
MCU_USB_P: U1.E16 U3.1
NetC1_2: C1.2 U2.2 X1.1
NetC2_2: C2.2 U2.3 X1.2
NetC3_1: C3.1 R5.2 U2.4
NetC36_1: C36.1 U4.47
NetC37_1: C37.1 U4.48
NetC58_1: C58.1 U6.C2
NetC68_2: C68.2 J1.5
NetC70_2: C70.2 J1.18
NetC71_2: C71.2 J1.20
NetC72_2: C72.2 J1.21
NetC73_2: C73.2 J1.22
NetC74_2: C74.2 J1.24
NetC?_1: C?.1 U7.9
NetL1_1: L1.1 U4.20
NetL2_1: L2.1 U4.23
NetL3_1: L3.1 U4.31
NetR1_1: R1.1 USBC1.A5
NetR2_1: R2.1 USBC1.B5
NetR3_2: R3.2 U2.17
NetR4_2: R4.2 U2.35
NetR13_2: R13.2 U4.35
NetR14_2: R14.2 U4.36
OSC32_IN: U1.C2
OSC32_OUT: U1.C1
OSC_IN: C28.1 U1.J2 X2.3
OSC_OUT: C27.1 U1.J1 X2.1
PA0: U1.N5 U6.M5
PA0_C: U1.T1
PA1: U1.N4
PA1_C: U1.T2
PA2: U1.N3
PA2_C: U1.R1
PA3: U1.U2
PA3_C: U1.R2
PA6: U1.R3
PA8: U1.E15
PA13: R7.1 U1.C15 U2.30
PA14: U1.B14 U2.12 U2.31
PA15: U1.A14
PB0: U1.U5
PB1: U1.T5
PB2: U1.R6
PB3: U1.C6 U2.22 U6.A5
PB4: U1.B7 U6.B2
PB5: U1.A5
PB6: U1.B5 U4.27
PB7: U1.C5 U4.28
PB8: U1.D5 U4.45 U6.B3
PB9: R12.1 U1.D4 U4.9 U6.B4
PB10: U1.P11
PB11: U1.P12
PB12: U1.T14
PB13: U1.U14
PB14: U1.U15 U6.A3
PB15: U1.T15 U6.A4
PC1: U1.M2
PC2: U1.M3
PC3: U1.M4
PC5: U1.U4
PC6: U1.F14 U6.B5
PC7: U1.F13 U6.B6
PC8: TF1.7 U1.E13
PC9: TF1.8 U1.E14
PC10: TF1.1 U1.A13
PC11: TF1.2 U1.B13
PC12: TF1.5 U1.C12
PC13: U1.E3 U4.13
PD2: TF1.3 U1.D12
PD3: U1.B12
PD4: U1.A12
PD5: U1.A11
PD6: U1.B11 U6.M6
PD7: U1.C11
PD11: U1.R15
PD12: U1.R16
PD13: U1.R17
PDR_ON: R8.1 U1.E7
PE2: U1.C3
PE3: U1.D3
PE4: U1.D2
PE5: U1.D1
PE6: U1.E5
PF6: U1.K2
PF7: U1.K3
PF8: U1.K4
PF9: U1.L4
PF10: U1.L3
PG2: U1.H16
PG3: U1.H15
PG6: U1.G15
PG7: U1.F16
PG9: U1.A10
PG10: U1.A9
PG11: U1.B9
PG12: U1.C9
PG13: U1.D9
PG14: U1.D8
PH2: U1.N2
PH3: U1.P2
PH4: U1.P3
PH5: U1.P4
PI11: U1.F4
PI12: U1.H1
PI13: U1.H2
PI14: U1.H3
PI15: U1.P5
PJ0: U1.N6
PJ1: U1.P6
PJ2: U1.T6
PJ3: U1.U6
PJ4: U1.U7
PJ7: U1.N14
PJ8: U1.N13
PJ9: U1.M14
PJ11: U1.K14
PJ12: U1.D11
PJ13: U1.E10
PJ14: U1.D10
PJ15: U1.B10
PMU_LDOPGOOD: U4.46
PMU_PB: SW1.1 U4.25
PMU_PGOOD: U4.26
R\E\S\E\T\: C26.1 R9.1 SW2.1 U1.K1 U2.15
SBU1: USBC1.A8
SBU2: USBC1.B8
SD_Card_CD: TF1.9
T_DIO_OUT: R7.2 U2.32
USB_N: U3.7 USBC1.A7 USBC1.B7
USB_P: U3.8 USBC1.A6 USBC1.B6
VBATT: "Battery Connector1.1" "Battery Connector1.2" "Battery Connector1.9" "Battery Connector1.10" "Battery Connector1.13" "Battery Connector1.14" U4.4 U4.5 U4.6
VBUS: U4.10 U4.12 USBC1.A4 USBC1.A9 USBC1.B4 USBC1.B9
VCC: C46.1 C47.1 C48.1 C49.1 C50.1 C51.1 C52.1 C53.1 C54.1 C55.1 C56.1 C57.1 C59.1 C60.1 C61.1 C62.1 C63.1 C64.1 C65.1 C66.1 C67.1 U5.A7 U5.B2 U5.B7 U5.C9 U5.D9 U5.E1 U5.F9 U5.L1 U5.L7 U5.M9 U5.N9 U5.P2 U5.P7 U5.R7 U6.C6 U6.E6 U6.F5 U6.J10 U6.K5 U6.K9 U6.M4 U6.N4 U6.P3 U6.P5
VDCDC1: C32.1 L1.2 U4.19
VDCDC2: C22.2 C23.2 C24.2 C33.1 L2.2 U1.A7 U1.D17 U1.U11 U4.24
VDCDC3: C34.1 L3.2 U4.29
VDDCAPDSI: C20.2 C21.2 U1.N17
VFBSMPS: "Battery Connector1.7" "Battery Connector1.8" "Battery Connector1.11" "Battery Connector1.12" "Battery Connector1.15" "Battery Connector1.16" C1.1 C2.1 C3.2 C4.2 C5.2 C6.2 C7.2 C8.2 C9.2 C10.2 C11.2 C12.2 C13.2 C14.2 C15.2 C16.2 C17.2 C18.2 C19.2 C20.1 C21.1 C22.1 C23.1 C24.1 C25.2 C26.2 C27.2 C28.2 C29.2 C30.2 C31.2 C32.2 C33.2 C34.2 C35.2 C36.2 C37.2 C38.2 C39.1 C40.1 C41.1 C42.1 C43.2 C44.2 C45.2 C46.2 C47.2 C48.2 C49.2 C50.2 C51.2 C52.2 C53.2 C54.2 C55.2 C56.2 C57.2 C58.2 C59.2 C60.2 C61.2 C62.2 C63.2 C64.2 C65.2 C66.2 C67.2 C68.1 C69.1 C70.1 C71.1 C72.1 C73.1 C74.1 C?.2 Encode1.C J1.17 R1.2 R2.2 R3.1 R4.1 R10.1 R11.2 R13.1 R14.1 SW1.2 SW2.2 TF1.6 TF1.10 TF1.11 TF1.12 TF1.13 U1.A1 U1.A17 U1.B2 U1.B6 U1.C10 U1.C13 U1.C16 U1.F2 U1.G2 U1.G7 U1.G8 U1.G9 U1.G10 U1.G11 U1.G16 U1.H7 U1.H8 U1.H9 U1.H10 U1.H11 U1.J3 U1.J7 U1.J8 U1.J9 U1.J10 U1.J11 U1.J16 U1.J17 U1.K7 U1.K8 U1.K9 U1.K10 U1.K11 U1.K15 U1.L7 U1.L8 U1.L9 U1.L10 U1.L11 U1.L15 U1.M15 U1.N1 U1.N16 U1.P1 U1.R4 U1.R8 U1.T12 U1.U1 U1.U17 U2.5 U2.18 U2.26 U2.36 U2.37 U3.5 U3.6 U4.30 U4.41 U4.49 U5.A3 U5.B3 U5.B8 U5.C1 U5.D1 U5.E9 U5.F1 U5.L3 U5.L9 U5.M1 U5.N1 U5.P3 U5.P8 U5.R3 U6.A6 U6.C4 U6.E7 U6.G5 U6.H10 U6.J5 U6.K8 U6.N2 U6.N5 U6.P4 U6.P6 U7.4 U7.5 U7.11 U7.30 U7.33 USBC1.A1 USBC1.A12 USBC1.B1 USBC1.B12 X2.2 X2.4
  other v1: 2.775,11.9 3.775,11.9 4.775,11.9 5.775,11.9 2.775,12.9 3.775,12.9 4.775,12.9 5.775,12.9 2.775,13.9 3.775,13.9 4.775,13.9 5.775,13.9 2.775,14.9 3.775,14.9 4.775,14.9 5.775,14.9 21.05,28.075 22.15,28.075 23.25,28.075 24.35,28.075 21.05,29.175 22.15,29.175 23.25,29.175 24.35,29.175 21.05,30.275 22.15,30.275 23.25,30.275 24.35,30.275 21.05,31.375 22.15,31.375 23.25,31.375 24.35,31.375
VLDO1_1.8V: C39.2 U4.3
VLDO2_3.3V: C40.2 C69.2 J1.15 J1.16 R12.2 TF1.4 U4.1 U7.1 U7.8 U7.10 U7.31
VLDO3_1.8V: C25.1 C41.2 U1.A6 U1.C17 U1.U12 U4.40
VLDO4_3.3V: C4.1 C5.1 C6.1 C7.1 C8.1 C9.1 C10.1 C11.1 C12.1 C13.1 C14.1 C15.1 C16.1 C17.1 C18.1 C19.1 C42.2 R5.1 R6.2 R8.2 R9.2 SW3.2 U1.B1 U1.E6 U1.E9 U1.E11 U1.F1 U1.F5 U1.F17 U1.G5 U1.G13 U1.G17 U1.H5 U1.H13 U1.J13 U1.K5 U1.K13 U1.L1 U1.L5 U1.L13 U1.M1 U1.M5 U1.M13 U1.N7 U1.N8 U1.N10 U1.N11 U1.N12 U1.P17 U2.1 U2.6 U2.19 U2.27 U3.10 U4.18 U4.43
VLXSMPS: U1.E1
VSYS: C29.1 C30.1 C31.1 C35.1 C38.1 U4.2 U4.7 U4.8 U4.21 U4.22 U4.32 U4.39 U4.42
pads on no net: "Battery Connector1.5" "Battery Connector1.6" Audio.0 Audio.1 Audio.2 Audio.3 Audio.4 Audio.5 Audio.6 Encode1.1 Encode1.2 Encode1.3 Encode1.4 Encode1.5 Encode1.6 J1.0 J1.1 J1.2 J1.3 J1.4 J1.6 J1.7 J1.8 J1.19 J1.23 R?.1 R?.2 SW1.0 SW1.3 SW1.4 SW2.0 SW2.3 SW2.4 SW3.0 SW3.3 SW3.4 TF1.0 U2.7 U2.8 U2.11 U2.13 U2.14 U2.16 U2.20 U2.29 U2.34 U4.14 U4.15 U4.16 U4.17 U4.33 U4.34 U4.37 U4.38 U4.44 U5.E3 U5.E7 U5.H7 U5.K2 U5.K3 U6.A1 U6.A2 U6.A7 U6.A8 U6.A9 U6.A10 U6.A11 U6.A12 U6.A13 U6.A14 U6.B1 U6.B7 U6.B8 U6.B9 U6.B10 U6.B11 U6.B12 U6.B13 U6.B14 U6.C1 U6.C3 U6.C5 U6.C7 U6.C8 U6.C9 U6.C10 U6.C11 U6.C12 U6.C13 U6.C14 U6.D1 U6.D2 U6.D3 U6.D4 U6.D12 U6.D13 U6.D14 U6.E1 U6.E2 U6.E3 U6.E5 U6.E8 U6.E9 U6.E10 U6.E12 U6.E13 U6.E14 U6.F1 U6.F2 U6.F3 U6.F10 U6.F12 U6.F13 U6.F14 U6.G1 U6.G2 U6.G3 U6.G10 U6.G12 U6.G13 U6.G14 U6.H1 U6.H2 U6.H3 U6.H5 U6.H12 U6.H13 U6.H14 U6.J1 U6.J2 U6.J3 U6.J12 U6.J13 U6.J14 U6.K1 U6.K2 U6.K3 U6.K6 U6.K7 U6.K10 U6.K12 U6.K13 U6.K14 U6.L1 U6.L2 U6.L3 U6.L12 U6.L13 U6.L14 U6.M1 U6.M2 U6.M3 U6.M7 U6.M8 U6.M9 U6.M10 U6.M11 U6.M12 U6.M13 U6.M14 U6.N1 U6.N3 U6.N6 U6.N7 U6.N8 U6.N9 U6.N10 U6.N11 U6.N12 U6.N13 U6.N14 U6.P1 U6.P2 U6.P7 U6.P8 U6.P9 U6.P10 U6.P11 U6.P12 U6.P13 U6.P14 U7.2 U7.3 U7.6 U7.7 U7.15 U7.16 U7.17 U7.18 U7.19 U7.20 U7.29 USBC1. USBC1.0

## Silkscreen, mask and mechanical layers (free items; w line width, h text height)
Mechanical 1:
  the board outline again, w0.254